# EAGLE board SOIC18_SO18L-DIP (EAGLE 8.4.3)
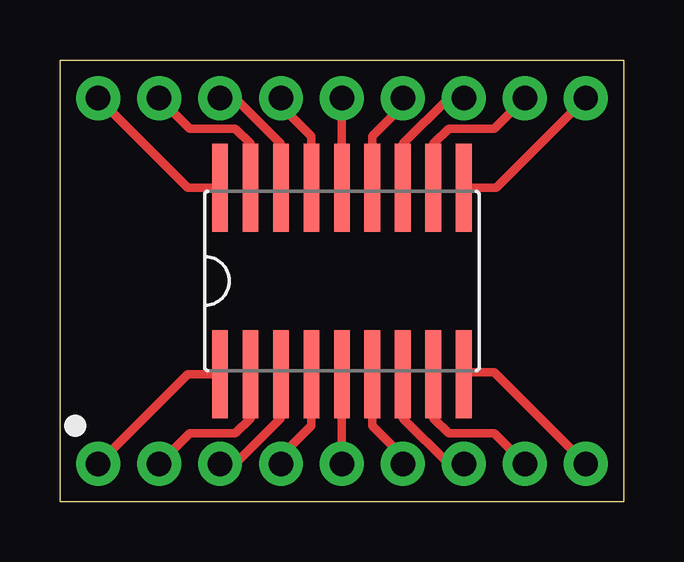
[diagram p0: board, top side]
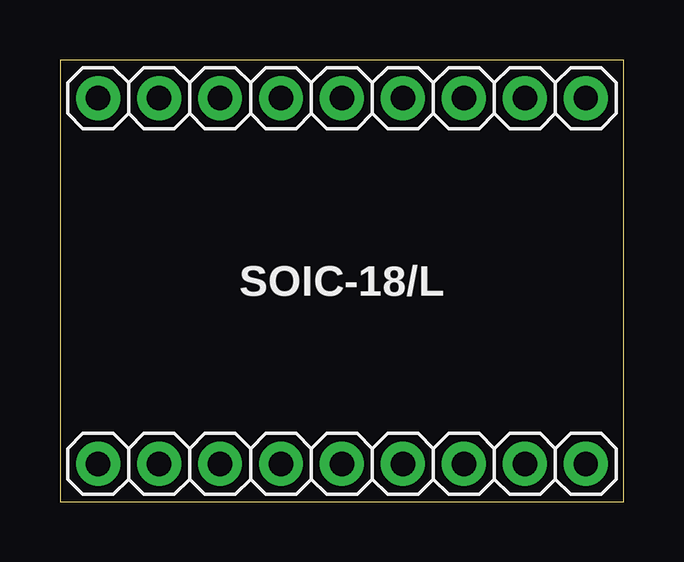
[diagram p1: board, bottom side, seen from below]

Size 23.5 x 18.41 mm. Coordinates in mm from the lower left corner, seen from the top.
Outline: 0,0 0,18.41 23.5,18.41 23.5,0 0,0
Copper layers (1*16): Top 0.035mm / dielectric 1.6mm / Bottom 0.035mm
Design rules "Elecrow_2-layer_PCB_eagle_rule *": minimum track width 6mil, minimum drill 12mil, track to track 6mil, track to pad 6mil, pad to pad 6mil, via to via 8mil, smd to smd 0mil, copper to edge 20mil, drill to drill 10mil, minimum pad ring 16mil, minimum via ring 6mil, stop-mask expansion 0mil, vias tented up to drill 100mil, thermal gap 10mil

## Footprints (pad centres in the part's own frame; a part is rotated, then mirrored left to right if it is on the bottom)
ADAPTER-18L = drill 1.016: 1 1.587,1.587; 2 4.128,1.587; 3 6.668,1.587; 4 9.207,1.587; 5 11.748,1.587; 6 14.287,1.587; 7 16.828,1.587; 8 19.367,1.587; 9 21.907,1.587; 10 21.907,16.828; 11 19.367,16.828; 12 16.828,16.828; 13 14.287,16.828; 14 11.748,16.828; 15 9.207,16.828; 16 6.668,16.828; 17 4.128,16.828; 18 1.587,16.828
SO18/L = smd 0.66 x 3.658: 1 -5.08,-3.886; 2 -3.81,-3.886; 3 -2.54,-3.886; 4 -1.27,-3.886; 5 0,-3.886; 6 1.27,-3.886; 7 2.54,-3.886; 8 3.81,-3.886; 9 5.08,-3.886; 10 5.08,3.886; 11 3.81,3.886; 12 2.54,3.886; 13 1.27,3.886; 14 0,3.886; 15 -1.27,3.886; 16 -2.54,3.886; 17 -3.81,3.886; 18 -5.08,3.886

## Placement (x,y rotation side)
SOIC-18/L  ADAPTER-18L  [ADAPTER-18L]  0,0 0 top
U1  DUMMY18  [SO18/L]  11.75,9.21 0 top

## Library data of the parts
SOIC-18/L = my-pinhead
U1 = my-ic

## Nets
1: SOIC-18/L.1 U1.1
2: SOIC-18/L.2 U1.2
3: SOIC-18/L.3 U1.3
4: SOIC-18/L.4 U1.4
5: SOIC-18/L.5 U1.5
6: SOIC-18/L.6 U1.6
7: SOIC-18/L.7 U1.7
8: SOIC-18/L.8 U1.8
9: SOIC-18/L.9 U1.9
10: SOIC-18/L.10 U1.10
11: SOIC-18/L.11 U1.11
12: SOIC-18/L.12 U1.12
13: SOIC-18/L.13 U1.13
14: SOIC-18/L.14 U1.14
15: SOIC-18/L.15 U1.15
16: SOIC-18/L.16 U1.16
17: SOIC-18/L.17 U1.17
18: SOIC-18/L.18 U1.18

## Tracks (layer width: path | path; a pad name or v marks a point on that pad's centre or on a via)
1
  Top 0.356: U1.1 5.32,5.32 SOIC-18/L.1
2
  Top 0.356: U1.2 7.94,3.49 7.3,2.86 5.4,2.86 SOIC-18/L.2
3
  Top 0.356: SOIC-18/L.3 7.3,1.59 9.21,3.49 U1.3
4
  Top 0.356: SOIC-18/L.4 9.21,1.91 10.48,3.17 U1.4
5
  Top 0.356: SOIC-18/L.5 U1.5
6
  Top 0.356: SOIC-18/L.6 14.29,1.91 13.02,3.17 U1.6
7
  Top 0.356: SOIC-18/L.7 16.19,1.59 14.29,3.49 U1.7
8
  Top 0.356: U1.8 15.56,3.49 16.19,2.86 18.1,2.86 SOIC-18/L.8
9
  Top 0.356: U1.9 16.9,5.4 18.1,5.4 SOIC-18/L.9
10
  Top 0.356: U1.10 18.17,13.09 SOIC-18/L.10
11
  Top 0.356: U1.11 15.56,14.92 16.19,15.56 18.1,15.56 SOIC-18/L.11
12
  Top 0.356: U1.12 14.29,14.92 16.19,16.83 SOIC-18/L.12
13
  Top 0.356: U1.13 13.02,15.24 14.29,16.51 SOIC-18/L.13
14
  Top 0.356: U1.14 SOIC-18/L.14
15
  Top 0.356: U1.15 10.48,15.24 9.21,16.51 SOIC-18/L.15
16
  Top 0.356: U1.16 9.21,14.92 7.3,16.83 SOIC-18/L.16
17
  Top 0.356: U1.17 7.94,14.92 7.3,15.56 5.4,15.56 SOIC-18/L.17
18
  Top 0.356: U1.18 5.32,13.09 SOIC-18/L.18